# Altium PCB WLE5_WB.PcbDoc
Units mm, origin at the board's own origin, x right, y up, seen from the top; angles counter-clockwise.
Board outline 50 x 50 mm, 4 copper layers (TOP, GND1, GND2, BOTTOM), stack 1 mm thick; 81 components, 59 nets, 256 pads, 19 vias.
Unrouted connection lines stored in the file: 97.
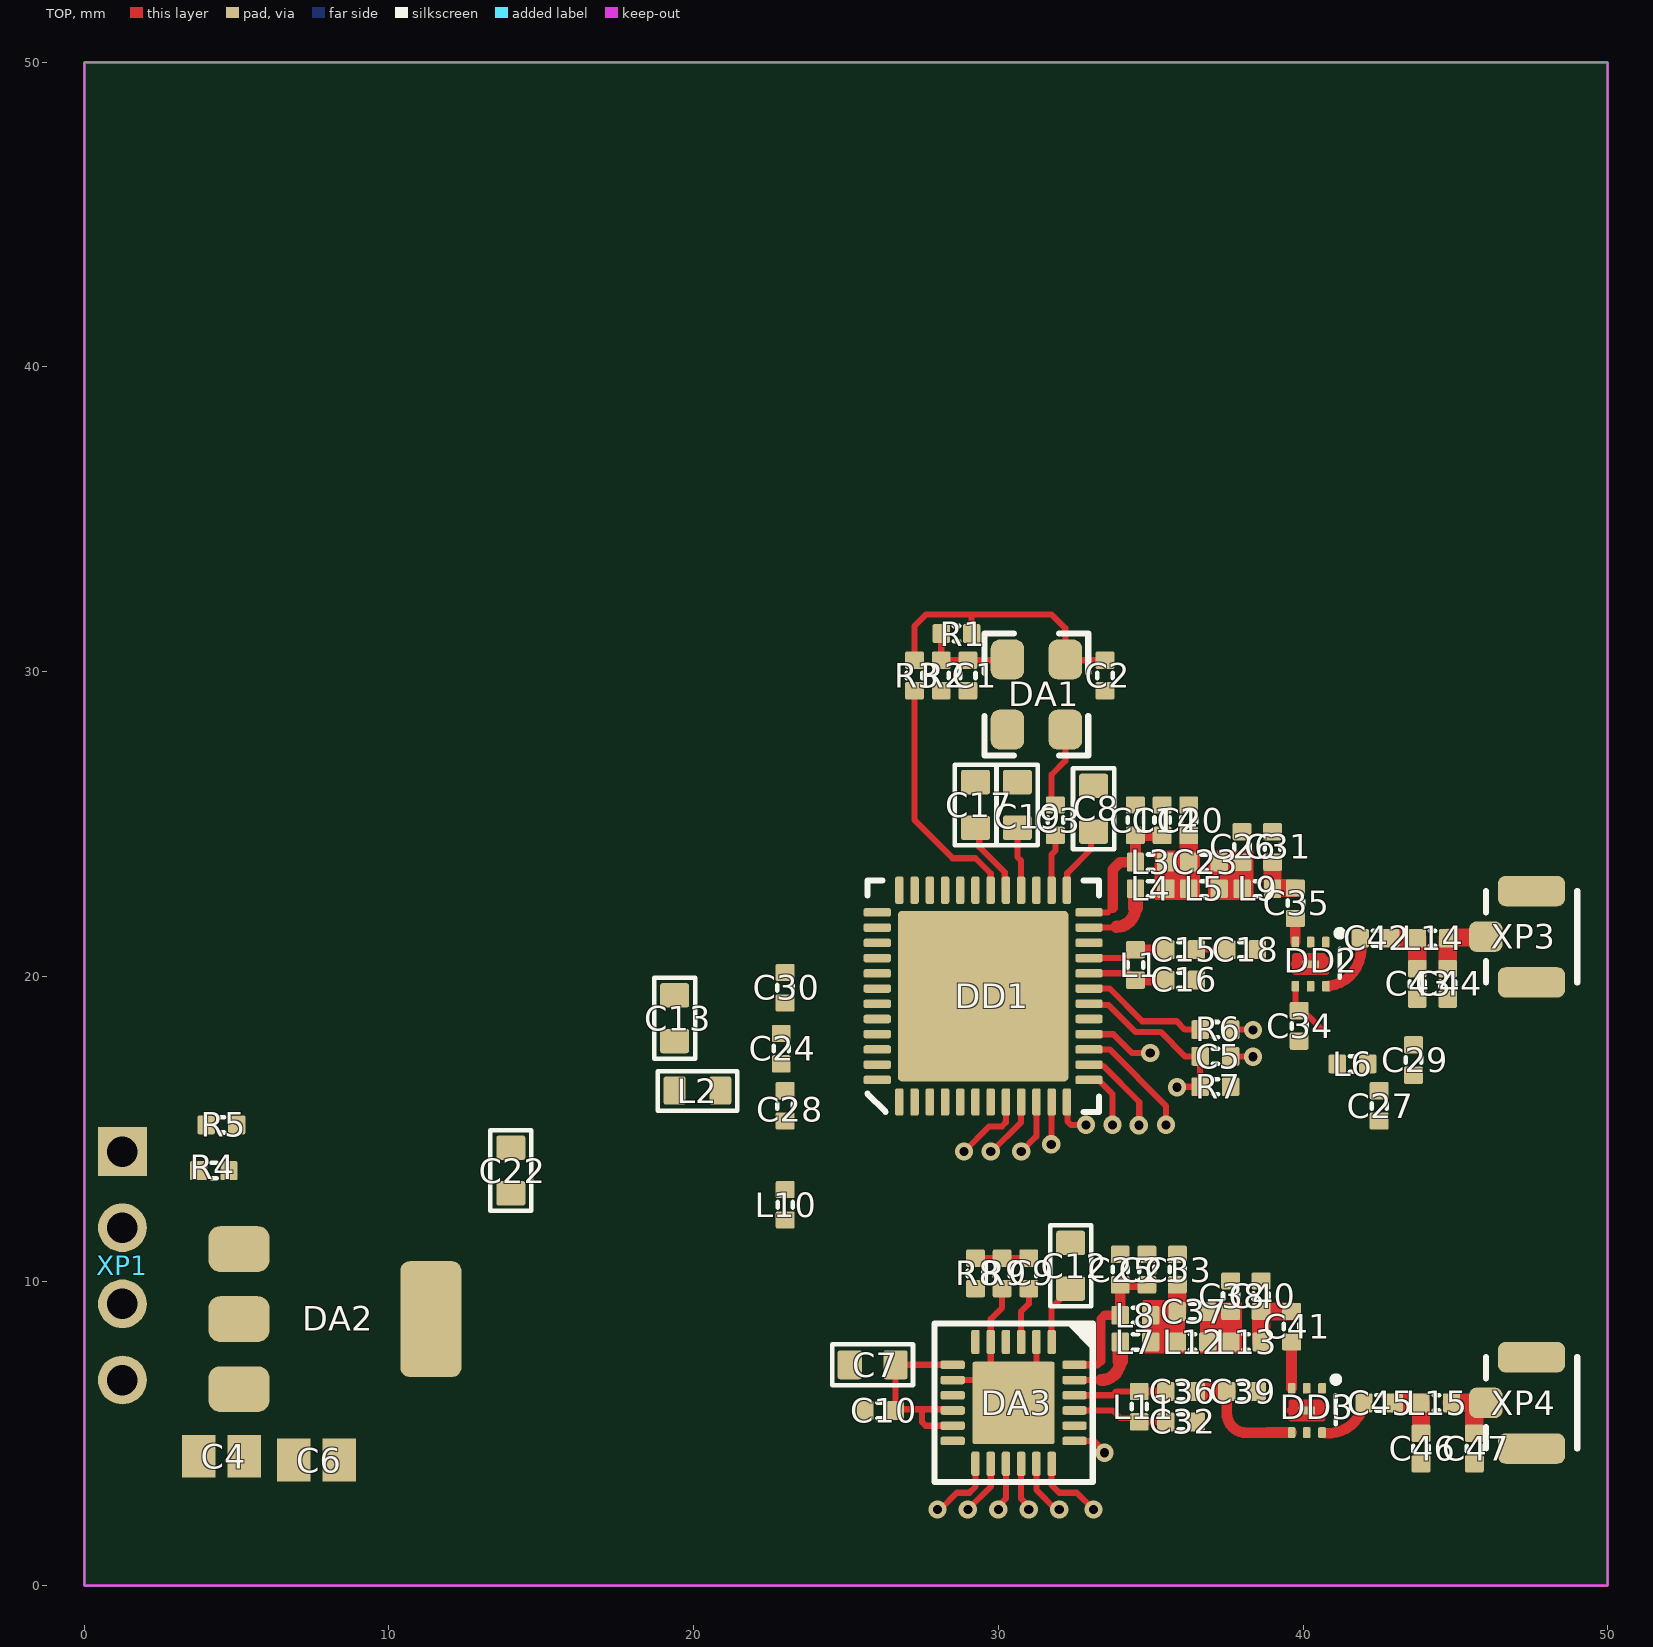
[diagram p0: TOP view]
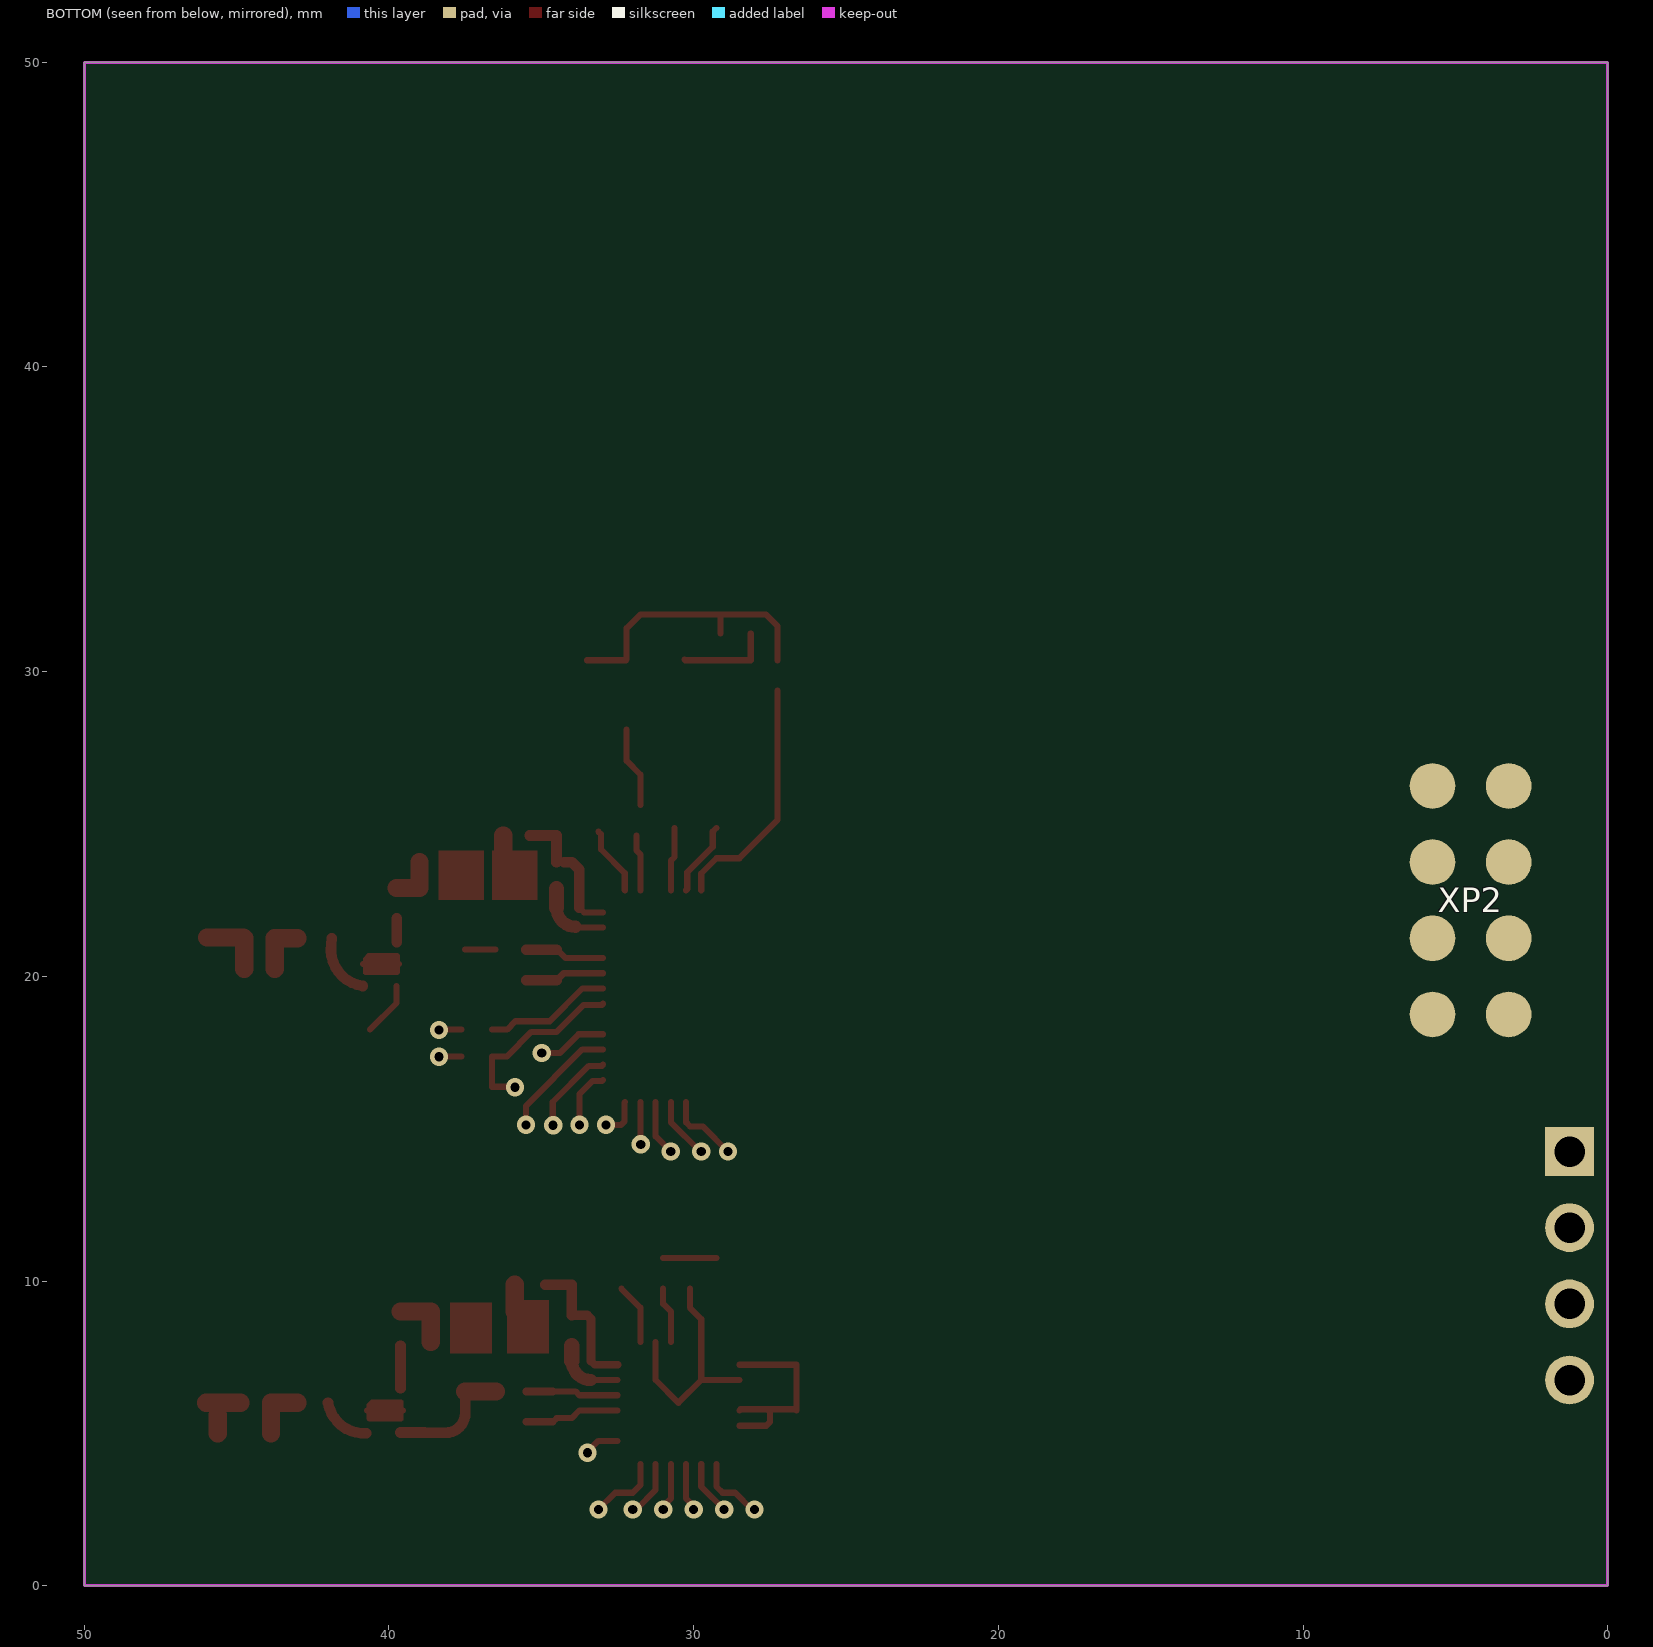
[diagram p1: BOTTOM view, seen from below]
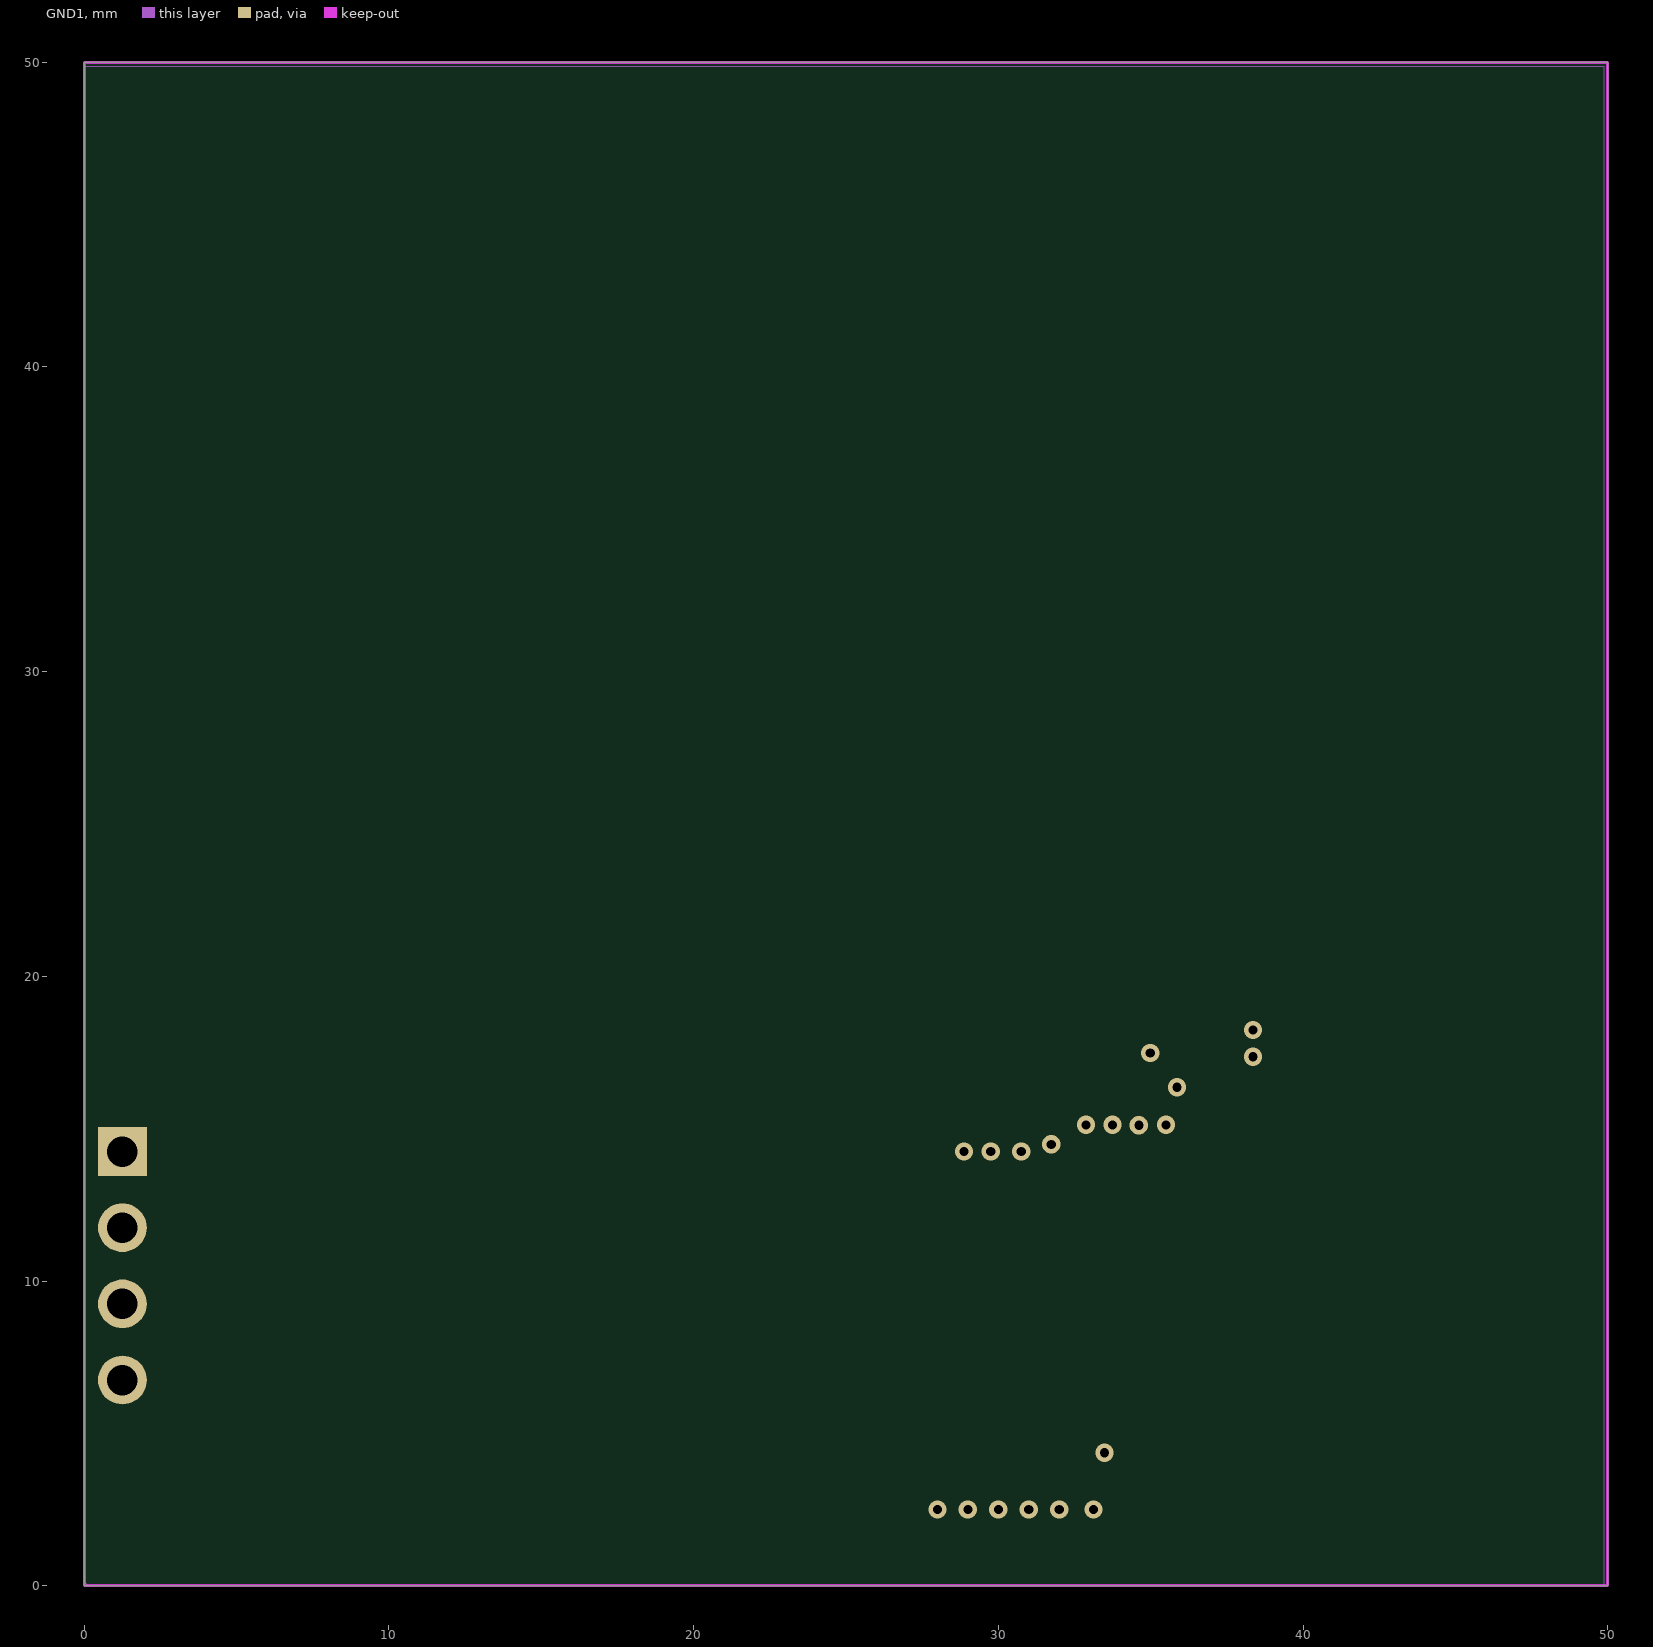
[diagram p2: GND1]

## Layer stack, top to bottom
Top Solder: solder mask 0.025, Solder Resist, Dk 3.5
TOP: signal copper 0.035
Dielectric1: core 0.255, FR-4, Dk 4.2
GND1: signal copper 0.035
Dielectric 3: prepreg 0.35, FR-4, Dk 4.2
GND2: signal copper 0.035
Dielectric 2: core 0.255, FR-4, Dk 4.2
BOTTOM: signal copper 0.035
Bottom Solder: solder mask 0.025, Solder Resist, Dk 3.5

## Board outline
0,0 50,0 50,50 0,50

## Design rules (kind name [scope] priority, off if disabled: settings)
AssemblyTestPointUsage [All] p1 off:
AssemblyTestpoint [All] p1 off: testpointundercomponent=TRUE minsize=1.016 maxsize=2.54 preferedsize=1.524 minholesize=0 maxholesize=1.016 preferedholesize=0.813 testpointgrid=0.025 usegrid=TRUE gridtolerance=0 allowsidetop=TRUE allowsidebottom=TRUE
BoardOutlineClearance [All] p1: gap=0.5 ignorepadtopadclearanceinfootprint=FALSE
Clearance Clearance_1 [HasFootprint ('ATSLP-10')] p1: gap=0.15 ignorepadtopadclearanceinfootprint=FALSE
Clearance Clearance_Polygon [InPolygon] p2: gap=0.3 ignorepadtopadclearanceinfootprint=FALSE
Clearance [All] p3: gap=0.15 ignorepadtopadclearanceinfootprint=FALSE
ComponentClearance [All] p1: gap=-5 collisioncheckmode=3 verticalgap=-5 showdistances=TRUE
FabricationTestPointUsage [All] p1 off: valid=0 allowmultiple=FALSE
FabricationTestpoint [All] p1 off: side=3 testpointundercomponent=TRUE minsize=1.016 maxsize=2.54 preferedsize=1.524 minholesize=0 maxholesize=1.016 preferedholesize=0.813 testpointgrid=0.025 allowsidetop=TRUE allowsidebottom=TRUE usegrid=TRUE gridtolerance=0
HoleSize [All] p1: absolutevalues=TRUE maxlimit=8 minlimit=0.025 maxpercent=80.000 minpercent=20.000
HoleToHoleClearance [All] p1: gap=0.25 allowstackedmicrovias=TRUE
MinimumSolderMaskSliver [All] p1: minsoldermaskwidth=0
PlaneClearance [All] p1: clearance=0.5
PlaneConnect [All] p1: planeconnectstyle=Relief reliefexpansion=0.5 reliefentries=4 reliefconductorwidth=0.3 reliefairgap=0.5
PolygonConnect PolygonConnect_via [isVia] p1: connectstyle=Direct reliefconductorwidth=0.254 reliefentries=4 polygonreliefangle="90 Angle" airgapwidth=0.254
PolygonConnect [All] p2: connectstyle=Relief reliefconductorwidth=0.3 reliefentries=4 polygonreliefangle="90 Angle" airgapwidth=0.3
RoutingCorners [All] p1: cornerstyle=45-Degree minsetback=2.5 maxsetback=2.5
RoutingVias [All] p1: holewidth=0.3 width=0.7 viastyle="Through Hole" minholewidth=0.2 minwidth=0.5 maxholewidth=0.4 maxwidth=0.8
SilkToSilkClearance [All] p1: silktosilkclearance=0
SilkToSolderMaskClearance [IsPad] p1: minsilkscreentomaskgap=-1 clearancetoexposedcopper=TRUE
SolderMaskExpansion [All] p1: expansion=0.1 istentingtop=FALSE
Width [All] p1: maxlimit=2 minlimit=0.2 preferedwidth=0.3 toplayer_prefwidth=0.2 bottomlayer_prefwidth=0.2 minimp=50.000000 maximp=50.000000 favimp=50.000000
17 further rules are at their usual default settings.

## Components (designator, comment, footprint, x,y, rotation, side; value= is the part's Value field where it differs from the comment)
C1 "C0402" C0402 29,29.875 r270 top value=100nF
C2 "C0402" C0402 33.5,29.875 r90 top value=100nF
C3 "C0402" C0402 31.875,25.125 r270 top value=1000pF
C4 "C0805" C0805 4.5,4.25 r0 top value=1uF
C5 "C0402" C0402 37.125,17.375 r0 top value=100nF
C6 "C0805" C0805 7.625,4.125 r0 top value=1uF
C7 "C0603" C0603 25.875,7.25 r180 top value=470nF
C8 "C0603" C0603 33.125,25.5 r90 top value=470nF
C9 "C0402" C0402 31,10.25 r270 top value=1000pF
C10 "C0402" C0402 26.125,5.75 r180 top value=100nF
C11 "C0402" C0402 34.5,25.125 r270 top value=100nF
C12 "C0603" C0603 32.375,10.5 r270 top value=470nF
C13 "C0603" C0603 19.375,18.625 r90 top value=4.7uF
C14 "C0402" C0402 35.375,25.125 r270 top value=100pF
C15 "C0402" C0402 36,20.875 r0 top value={Value}
C16 "C0402" C0402 36,19.875 r0 top value={Value}
C17 "C0603" C0603 29.25,25.625 r90 top value=470nF
C18 "C0402" C0402 38,20.875 r0 top value={Value}
C19 "C0603" C0603 30.625,25.625 r90 top value=470nF
C20 "C0402" C0402 36.25,25.125 r90 top value={Value}
C21 "C0402" C0402 34.875,10.375 r270 top value=100nF
C22 "C0603" C0603 14,13.625 r90 top value=4.7uF
C23 "C0402" C0402 36.75,23.75 r0 top value={Value}
C24 "C0402" C0402 22.875,17.625 r90 top value=100nF
C25 "C0402" C0402 34,10.375 r270 top value=100pF
C26 "C0402" C0402 38,24.25 r90 top value={Value}
C27 "C0402" C0402 42.5,15.75 r90 top value={Value}
C28 "C0402" C0402 23,15.75 r90 top value=100nF
C29 "C0402" C0402 43.625,17.25 r90 top value={Value}
C30 "C0402" C0402 23,19.625 r90 top value=100nF
C31 "C0402" C0402 39,24.25 r90 top value={Value}
C32 "C0402" C0402 36,5.375 r0 top value={Value}
C33 "C0402" C0402 35.875,10.375 r90 top value={Value}
C34 "C0402" C0402 39.875,18.375 r90 top value={Value}
C35 "C0402" C0402 39.75,22.4 r270 top value=100pF
C36 "C0402" C0402 36,6.375 r0 top value={Value}
C37 "C0402" C0402 36.375,9 r0 top value={Value}
C38 "C0402" C0402 37.625,9.5 r90 top value={Value}
C39 "C0402" C0402 38,6.375 r0 top value={Value}
C40 "C0402" C0402 38.625,9.5 r90 top value={Value}
C41 "C0402" C0402 39.625,8.5 r270 top value=100pF
C42 "C0402" C0402 42.375,21.25 r0 top value=100pF
C43 "C0402" C0402 43.75,19.75 r270 top value={Value}
C44 "C0402" C0402 44.75,19.75 r270 top value={Value}
C45 "C0402" C0402 42.5,6 r0 top value=100pF
C46 "C0402" C0402 43.875,4.5 r270 top value={Value}
C47 "C0402" C0402 45.625,4.5 r270 top value={Value}
DA1 "O32.000000-JT32C-A-K-3.3-LF" ZQ_3.2_2.5 31.25,29.25 r270 top
DA2 "LDL1117S33R" SOT223 8.375,8.75 r270 top value={Value}
DA3 "SX1262IMLRT" QFN-24(4X4) 30.5,6 r270 top value={Value}
DD1 "STM32WLE5CCU6" QFN48(7X7) 29.5,19.35 r90 top value={Value}
DD2 "CG2164X3-C2" TSON-6 40.25,20.4 r270 top value={Value}
DD3 "CG2164X3-C2" TSON-6 40.125,5.75 r270 top value={Value}
L1 "L0402" L_0402 34.5,20.375 r90 top value={Value}
L2 "BLM18AG601SN1" L0603 20.125,16.25 r0 top
L3 "L0402" L_0402 35,23.75 r0 top value={Value}
L4 "L0402" L_0402 35,22.875 r0 top value={Value}
L5 "L0402" L_0402 36.75,22.875 r0 top value={Value}
L6 "L0402" L_0402 41.625,17.125 r0 top value={Value}
L7 "L0402" L_0402 34.5,8 r0 top value={Value}
L8 "L0402" L_0402 34.5,8.875 r0 top value={Value}
L9 "L0402" L_0402 38.5,22.875 r0 top value={Value}
L10 "L0402" L_0402 23.003,12.502 r90 top value={Value}
L11 "L0402" L_0402 34.625,5.875 r90 top value={Value}
L12 "L0402" L_0402 36.375,8 r0 top value={Value}
L13 "L0402" L_0402 38.125,8 r0 top value={Value}
L14 "L0402" L_0402 44.25,21.25 r0 top value={Value}
L15 "L0402" L_0402 44.375,6 r0 top value={Value}
R1 "R0402" R0402 28.625,31.25 r180 top value=68k
R2 "R0402" R0402 28.125,29.875 r270 top value=68k*
R3 "R0402" R0402 27.25,29.875 r90 top value=100
R4 "R0402" R0402 4.25,13.625 r0 top value=1k
R5 "R0402" R0402 4.5,15.125 r0 top value=1k
R6 "R0402" R0402 37.125,18.25 r0 top value=10k
R7 "R0402" R0402 37.125,16.375 r0 top value=10k
R8 "R0402" R0402 29.25,10.25 r90 top value=2k
R9 "R0402" R0402 30.125,10.25 r270 top value=1k
XP1 "PLS4R" PLS4R 1.25,14.25 r270 top value={Value}
XP2 "PAD_4X2X2.5" PAD_4X2X2.5 3.25,18.75 r90 bottom
XP3 "U.FL-R-SMT-1" U.FL-R-SMT-1 47.5,21.3 r90 top value={Value}
XP4 "U.FL-R-SMT-1" U.FL-R-SMT-1 47.5,6 r90 top locked value={Value}

## Footprints (in the part's own frame and the unit in brackets; to place one, negate y for a bottom-side part, rotate by r counter-clockwise, add the part's x,y. Pads: shape width x height; smd on the part's side, far side on the other; paste and mask are expansions set on the pad)
C0402 [mm]
  rrect20% 0.57x0.62 smd mask+0.06: 1(-0.5,0) 2(0.5,0)
  silkscreen extent -0.09,-0.25 0.09,0.25, body extent -0.5,-0.25 0.5,0.25, height 0.49
C0603 [mm]
  rrect20% 0.8x0.95 smd mask+0.06: 1(-0.75,0) 2(0.75,0)
  silkscreen extent -1.33,-0.67 1.33,0.67, body extent -0.8,-0.4 0.8,0.4, height 0.8
C0805 [mm] "Chip Capacitor, Body 2.0x1.3mm, IPC High Density"
  rect 1.1x1.4 smd: 1(-0.75,0) 2(0.75,0)
  body extent -1.1,-0.72 1.1,0.72, height 1.4
L0603 [mm]
  rrect20% 0.72x0.92 smd mask+0.06: 1(-0.75,0) 2(0.75,0)
  silkscreen extent -1.3,-0.66 1.3,0.64, body extent -0.8,-0.4 0.8,0.4, height 0.45
L_0402 [mm]
  rrect20% 0.57x0.62 smd mask+0.06: 1(-0.5,0) 2(0.5,0)
  silkscreen extent -0.09,-0.25 0.09,0.25, body extent -0.5,-0.25 0.5,0.25, height 0.5
PAD_4X2X2.5 [mm]
  round 1.5 smd paste-1 mask+0.06: 1(0,0) 2(0,2.5) 3(2.5,0) 4(2.5,2.5) 5(5,0) 6(5,2.5) 7(7.5,0) 8(7.5,2.5)
PLS4R [mm]
  rect 1.6x1.6 hole 1: 1(0,0)
  round 1.6 hole 1: 2(2.5,0) 3(5,0) 4(7.5,0)
QFN48(7X7) [mm]
  rrect50% 0.9x0.28 smd: 1(-3.475,2.75) 2(-3.475,2.25) 3(-3.475,1.75) 4(-3.475,1.25) 5(-3.475,0.75) 6(-3.475,0.25) 7(-3.475,-0.25) 8(-3.475,-0.75) 9(-3.475,-1.25) 10(-3.475,-1.75) 11(-3.475,-2.25) 12(-3.475,-2.75) 25(3.475,-2.75) 26(3.475,-2.25) 27(3.475,-1.75) 28(3.475,-1.25) 29(3.475,-0.75) 30(3.475,-0.25) 31(3.475,0.25) 32(3.475,0.75) 33(3.475,1.25) 34(3.475,1.75) 35(3.475,2.25) 36(3.475,2.75)
  rrect50% 0.28x0.9 smd: 13(-2.75,-3.475) 14(-2.25,-3.475) 15(-1.75,-3.475) 16(-1.25,-3.475) 17(-0.75,-3.475) 18(-0.25,-3.475) 19(0.25,-3.475) 20(0.75,-3.475) 21(1.25,-3.475) 22(1.75,-3.475) 23(2.25,-3.475) 24(2.75,-3.475) 37(2.75,3.475) 38(2.25,3.475) 39(1.75,3.475) 40(1.25,3.475) 41(0.75,3.475) 42(0.25,3.475) 43(-0.25,3.475) 44(-0.75,3.475) 45(-1.25,3.475) 46(-1.75,3.475) 47(-2.25,3.475) 48(-2.75,3.475)
  rrect5% 5.6x5.6 smd: 49(0,0)
  silkscreen extent -3.8,-3.8 3.8,3.8, body extent -3.51,-3.51 3.51,3.51, height 0.78
QFN-24(4X4) [mm]
  rrect50% 0.8x0.28 smd mask+0.06: 1(-2,1.25) 2(-2,0.75) 3(-2,0.25) 4(-2,-0.25) 5(-2,-0.75) 6(-2,-1.25) 13(2,-1.25) 14(2,-0.75) 15(2,-0.25) 16(2,0.25) 17(2,0.75) 18(2,1.25)
  rrect50% 0.28x0.8 smd mask+0.06: 7(-1.25,-2) 8(-0.75,-2) 9(-0.25,-2) 10(0.25,-2) 11(0.75,-2) 12(1.25,-2) 19(1.25,2) 20(0.75,2) 21(0.25,2) 22(-0.25,2) 23(-0.75,2) 24(-1.25,2)
  rrect5% 2.7x2.7 smd paste-2 mask+0.06: 25(0,0)
  silkscreen extent -2.6,-2.6 2.6,2.6, body extent -2,-2 2,2, height 0.77
R0402 [mm]
  rrect20% 0.57x0.62 smd mask+0.06: 1(-0.5,0) 2(0.5,0)
  silkscreen extent -0.09,-0.25 0.09,0.25, body extent -0.57,-0.27 0.58,0.28, height 0.41
SOT223 [mm]
  rrect50% 1.5x2 smd: 1(-2.3,-3.3) 2(0,-3.3) 3(2.3,-3.3)
  rrect30% 3.8x2 smd: 4(0,3)
  body extent -3.25,-3.45 3.25,3.45, height 1.7
TSON-6 [mm]
  rrect30% 0.35x0.25 smd mask+0.07: 1(-0.725,0.5) 2(-0.725,0) 3(-0.725,-0.5) 4(0.725,-0.5) 5(0.725,0) 6(0.725,0.5)
  rrect20% 0.25x0.55 smd mask+0.22: 7(0,0)
  TOP region: -0.2,0.6 0.275,0.6 0.29,0.6 0.317,0.588 0.338,0.567 0.35,0.54 0.35,0.525 0.35,0.525 0.35,-0.525 0.35,-0.54 0.339,-0.568 0.317,-0.589 0.29,-0.6 0.275,-0.6 0.275,-0.6 -0.275,-0.6 -0.29,-0.6 -0.318,-0.589 -0.339,-0.568 -0.35,-0.54 -0.35,-0.525 -0.35,-0.525 -0.35,0.45
  TOP lines w0.2: 0,-0.575 0,0.025 ; 0,0 0,0.6
  silkscreen extent -1.07,0.9 0.45,1.01, body extent -0.75,-0.75 0.75,0.75, height 0.37
U.FL-R-SMT-1 [mm]
  rrect50% 1x1.1 smd mask+0.06: 1(0,1.5)
  rrect50% 1x2.2 smd mask+0.06: 2(-1.5,0) 2(1.5,0)
  silkscreen extent -1.5,-1.5 1.5,1.5, body extent -1.5,-1.55 1.5,1.55, height 1.25
ZQ_3.2_2.5 [mm]
  rrect50% 1.3x1.1 smd mask+0.06: 1(-1.15,-0.95) 2(1.15,-0.95) 3(1.15,0.95) 4(-1.15,0.95)
  silkscreen extent -2,-1.7 2,1.7, body extent -1.6,-1.25 1.6,1.25, height 0.6

## Part data
DA1: library part TCXO_3225, Mounting  Method=SMD
L2: library part BEAD, Mounting  Method=SMD
C1 C2 C3 C4 C5 C6 C7 C8 C9 C10 C11 C12 C13 C14 C15 C16 C17 C18 C19 C20 C21 C22 C23 C24 C25 C26 C27 C28 C29 C30 C31 C32 C33 C34 C35 C36 C37 C38 C39 C40 C41 C42 C43 C44 C45 C46 C47 DA2 DA3 DD1 DD2 DD3 L1 L3 L4 L5 L6 L7 L8 L9 L10 L11 L12 L13 L14 L15 R1 R2 R3 R4 R5 R6 R7 R8 R9 XP2 XP3 XP4: Mounting  Method=SMD
XP1: Mounting  Method=THT

## Via types
v1: diameter 0.6, hole 0.3, TOP to BOTTOM, 17 vias
v2: diameter 0.6/0.6/0.6/0.6 (per signal layer), hole 0.3, TOP to BOTTOM, 2 vias

## Nets (pads, with @x,y where several pads share a name; then routed paths per layer and width w, separated by ;. In a path a pad name is that pad's centre, name@x,y a point inside that pad or via, vN(x,y) a via of type N, cw(c..) or ccw(c..) an arc to the next point about the centre after c; other vN are vias at no path point)
BOOT: DD1.19 R6.1 XP2.3 | length 4.2
  TOP w0.2: DD1.19 33.65,19.6 34.725,18.525 35.85,18.525 36.125,18.25 R6.1
BSY0: DA3.14 DD1.8 | length 4.3
  TOP w0.2: v1(28.875,14.25) 29.7,15.075 30.12,15.075 30.25,15.205 DD1.8 ; v1(29,2.5) 29.75,3.25 DA3.14
GND: C1.2 C2.1 C4.2 C5.2 C6.2 C7.2 C8.2 C10.2 C11.1 C12.1 C13.2 C14.1 C16.2 C17.2 C18.2 C19.2 C20.2 C21.1 C22.2 C24.2 C25.1 C26.2 C27.2 C28.2 C30.2 C31.2 C32.2 C33.2 C38.2 C39.2 C40.2 C43.2 C44.2 C46.2 C47.2 DA1.2 DA2.1 DA3.2 DA3.5 DA3.8 DA3.20 DA3.25 DD1.48 DD1.49 DD2.7 DD3.7 L10.1 R2.2 R6.2 R9.2 XP1.4 XP2.7 XP3.2 XP4.2 | length 9.3
  TOP w0.2: DA3.8 DA3.25@29.75,6.75 ; R9.2 30.125,9.125 29.75,8.75 DA3.5 DA3.25@29.75,6.75 ; DA3.2 31.25,6.75 DA3.25 DA3.25@29.75,6.75 ; C5.2 v2@38.375,17.375 ; R6.2 v2@38.375,18.25
  other v2: 38.361,17.361 38.361,18.236
INT0: DA3.13 DD1.9 | length 4.4
  TOP w0.2: v1(28,2.5) 28.087,2.5 28.637,3.05 29.05,3.05 29.25,3.25 DA3.13 ; v1(29.75,14.25) 29.79,14.25 30.75,15.21 DD1.9
MCO: DD1.16 R8.1 | length 2.3
  TOP w0.2: DD1.16 33.775,18.1 34.386,17.489 34.983,17.489 v1(34.986,17.486)
MISO: DA3.16 DD1.14 | length 4.5
  TOP w0.2: DA3.16 30.75,2.858 31,2.608 v1(31,2.5) ; DD1.14 33.015,17.06 33.44,17.06 34.625,15.875 v1@34.625,15.125
  other v1: 34.611,15.111
MOSI: DA3.17 DD1.15 | length 5.8
  TOP w0.2: DA3.17 31.25,3.142 31.892,2.5 v1(32,2.5) ; DD1.15 33.65,17.6 35.5,15.75 v1(35.5,15.125)
NetC1_1: C1.1 DA1.1 R1.2 R2.1 | length 3.1
  TOP w0.2: R1.2 R2.1 C1.1 30.275,30.375 DA1.1
NetC2_2: C2.2 DA1.4 R1.1 R3.2 | length 9.4
  TOP w0.2: R3.2 27.25,31.5 27.625,31.875 29.125,31.875 ; R1.1 29.125,31.875 ; C2.2 32.225,30.375 DA1.4 32.2,31.425 31.75,31.875 29.125,31.875
NetC3_1: C3.1 DA1.3 | length 2.7
  TOP w0.2: C3.1@31.75,25.625 31.75,26.625 32.2,27.075 DA1.3
NetC3_2: C3.2 DD1.26 | length 1.9
  TOP w0.2: DD1.26 31.75,24 31.875,24.125 C3.2
NetC4_1: C4.1 DA2.3 XP1.3
NetC9_1: C9.1 R8.2 R9.1 | length 1.8
  TOP w0.2: R8.2 C9.1
NetC9_2: C9.2 DA3.3 | length 1.9
  TOP w0.2: DA3.3 30.75,9 31,9.25 C9.2
NetC11_2: C11.2 C14.2 DD1.24 L3.1 | length 4.4
  TOP w0.2: DD1.24 33.6,22.1 33.75,22.25
  TOP w0.35: 33.75,22.25 33.75,23.5 34,23.75 L3.1@34.25,23.75 ; L3.1 C11.2 C14.2
NetC13_1: C13.1 DD1.41 L2.1
NetC15_1: C15.1 DD1.21 L1.2 | length 2.6
  TOP w0.2: DD1.21 34.2,20.6 34.475,20.875 L1.2
  TOP w0.35: L1.2 C15.1
NetC15_2: C15.2 C18.1 L6.1 | length 1
  TOP w0.2: C15.2 C18.1
NetC16_1: C16.1 DD1.20 L1.1 | length 2.9
  TOP w0.2: DD1.20 34.25,20.1 34.463,19.887 L1.1@34.488,19.887 ; L1.1@34.275,20.1 L1.1@34.488,19.887 ; L1.1 L1.1@34.488,19.887 ; L1.1@34.513,19.887 L1.1@34.488,19.887
  TOP w0.35: L1.1 C16.1
NetC17_1: C17.1 DD1.29 DD1.45 | length 2.5
  TOP w0.2: C17.1 29.375,24.75 29.375,24.25 30.21,23.415 30.21,22.865 DD1.29
NetC20_1: C20.1 C23.1 L3.2 L4.2 L5.1 | length 0.9
  TOP w0.6: C23.1 C20.1
NetC21_2: C21.2 C25.2 DA3.24 L8.1 | length 4.9
  TOP w0.25: DA3.24 33.25,7.25 33.375,7.375
  TOP w0.3: 33.375,7.375 33.375,8.758 33.492,8.875 L8.1
  TOP w0.35: L8.1 C25.2 C21.2
NetC23_2: C23.2 C26.1 L5.2 L9.1
NetC27_1: C27.1 C29.1 L6.2
NetC29_2: C29.2 C34.1 L10.2
NetC31_1: C31.1 C35.1 L9.2 | length 1.7
  TOP w0.2: L9.2 L9.2@39.125,22.875
  TOP w0.6: C31.1 39,22.9 C35.1
NetC32_1: C32.1 DA3.21 L11.1 | length 3.2
  TOP w0.2: DA3.21 33.75,5.75 34,5.5 34.5,5.5 L11.1
  TOP w0.25: L11.1 C32.1
NetC33_1: C33.1 C37.1 L7.2 L8.2 L12.1 | length 1.1
  TOP w0.2: L8.2 L8.2@35.062,8.812 ; L12.1@35.812,8.063 L12.1
  TOP w0.6: C37.1 C33.1@35.875,9.875
NetC34_2: C34.2 DD2.4 | length 1.8
  TOP w0.2: DD2.4 39.75,19.125 40.625,18.25
NetC35_2: C35.2 DD2.3 | length 0.8
  TOP w0.35: DD2.3 C35.2
NetC36_1: C36.1 DA3.22 L11.2 | length 3.1
  TOP w0.2: DA3.22 33.75,6.25 33.875,6.375 L11.2
  TOP w0.25: L11.2 C36.1
NetC36_2: C36.2 C39.1 DD3.4 | length 4.2
  TOP w0.35: C39.1 37.5,5.661 ccw(c38.143,5.661) 38.143,5.019 38.708,5.019 38.833,5.019 38.84,5.025 DD3.4
  TOP w0.6: C36.2 C39.1
NetC37_2: C37.2 C38.1 L12.2 L13.1 | length 0
NetC40_1: C40.1 C41.1 L13.2 | length 2
  TOP w0.6: L13.2 C40.1 C41.1
NetC41_2: C41.2 DD3.3 | length 1.4
  TOP w0.35: DD3.3 C41.2@39.625,7.875
NetC42_1: C42.1 DD2.6 | length 2.1
  TOP w0.35: DD2.6@40.867,19.685 ccw(c40.705,20.875) 41.894,21.045 41.893,21.052 41.893,21.054 C42.1
NetC42_2: C42.2 C43.1 L14.1 | length 1.9
  TOP w0.2: C42.2 C42.2@43,21.25
  TOP w0.6: C42.2@43,21.25 L14.1 C43.1
NetC44_1: C44.1 L14.2 XP3.1 | length 2.3
  TOP w0.2: L14.2 L14.2@44.775,21.275 ; XP3.1@45.975,21.275 XP3.1
  TOP w0.6: C44.1 L14.2 ; L14.2@44.775,21.275 XP3.1@45.975,21.275
NetC45_1: C45.1 DD3.6 | length 1.8
  TOP w0.35: DD3.6@40.743,5.001 ccw(c40.814,6.202) C45.1
NetC45_2: C45.2 C46.1 L15.1 | length 1.9
  TOP w0.6: C45.2 L15.1 C46.1
NetC47_1: C47.1 L15.2 XP4.1 | length 2.3
  TOP w0.2: XP4.1@45.625,5.594 46,5.969 XP4.1
  TOP w0.6: L15.2 XP4.1 ; C47.1 XP4.1@45.625,5.594
NetDA3_23: DA3.23 L7.1 | length 2.4
  TOP w0.2: DA3.23 33.375,6.75
  TOP w0.4: 33.375,6.75 ccw(c33.375,7.375) 34,7.375
  TOP w0.5: 34,7.375 L7.1@34,7.875
NetDD1_23: DD1.23 L4.1 | length 2.5
  TOP w0.2: DD1.23 33.85,21.6
  TOP w0.4: 33.875,21.625 ccw(c33.875,22.25) 34.5,22.25
  TOP w0.5: 34.5,22.25 L4.1
NetDD1_30: DD1.30 R3.1 | length 8
  TOP w0.2: R3.1 27.25,25.125 28.5,23.875 29.25,23.875 29.75,23.375 DD1.30
NetR4_1: R4.1 XP1.1 XP2.6
NetR5_1: R5.1 XP1.2 XP2.5
NRST: C5.1 DD1.18 R7.1 XP2.4 | length 6
  TOP w0.2: DD1.18 33.015,19.06 33.611,19.06 34.496,18.175 35.325,18.175 36.125,17.375 C5.1 R7.1 v1@36,16.375
  other v1: 35.861,16.361
NSS0: DA3.19 DD1.12 | length 2.5
  TOP w0.2: DD1.12 32.267,15.858 32.267,15.242 32.384,15.125 v1(32.875,15.125) ; DA3.19 33.125,4.75 v1@33.5,4.375
  other v1: 33.486,4.361
RST0: DA3.15 DD1.10 | length 3.4
  TOP w0.2: v1(30,2.5) 30,2.608 30.25,2.858 DA3.15 ; v1(30.75,14.25) 31.25,14.75 DD1.10
RXD: DD1.33 R4.2
SCK: DA3.18 DD1.13 | length 4.4
  TOP w0.2: DA3.18 31.75,3.3 32,3.05 32.575,3.05 v1(33.125,2.5) ; DD1.13 33.015,16.56 33.325,16.56 33.75,16.135 v1(33.75,15.125)
SWCLK: DD1.42 XP2.2
SWDIO: DD1.36 XP2.1
TXD: DD1.17 R5.2
VC1: DD1.38 DD2.2
VC2: DD1.39 DD2.5
VC3: DD1.5 DD3.2
VC4: DD1.6 DD3.5
VCC: C6.1 C7.1 C8.1 C10.1 C12.2 C19.1 C22.1 C24.1 C28.1 C30.1 DA2.2 DA3.1 DA3.7 DA3.10 DA3.11 DD1.11 DD1.25 DD1.28 DD1.37 DD1.44 DD1.46 L2.2 R7.2 XP2.8 | length 14.6
  TOP w0.2: C10.1 C7.1 DA3.7 ; C10.1@26.71,5.79 27.585,5.79 ; DA3.11 27.617,5.25 27.5,5.367 27.5,5.705 27.585,5.79 ; DA3.10 28.46,5.79 27.585,5.79 ; C19.1 30.625,23.917 30.75,23.792 DD1.28 ; DA3.1 31.75,9.125 C12.2 ; v1@31.75,14.375 DD1.11 ; DD1.25 32.262,22.837 32.262,23.387 33.042,24.167 33.042,24.667 C8.1
  other v1: 31.736,14.486
pads on no net: DA2.4 DA3.4 DA3.6 DA3.9 DA3.12 DD1.1 DD1.2 DD1.3 DD1.4 DD1.7 DD1.22 DD1.27 DD1.31 DD1.32 DD1.34 DD1.35 DD1.40 DD1.43 DD1.47 DD2.1 DD3.1

## Polygon pours and split planes (outlines as drawn)
GND on GND1 "NONET_L02_P000" (solid, remove dead copper, shelved, pour order 0): 0.125,0 0,0.125 0,49.875 49.875,49.875 49.875,0

## Keep-outs
Keep-Out Layer:
  the board outline again, w0.1

## Other copper
TOP:
  rectangle net NetC20_1: 35.125,22.5 36.625,24.125
  rectangle net NetC23_2: 36.875,22.5 38.375,24.125
  rectangle net NetC37_2: 36.614,7.625 38,9.301
  rectangle net NetC33_1: 34.75,7.625 36.125,9.375